# EAGLE board Power_Supply (EAGLE 5.06)
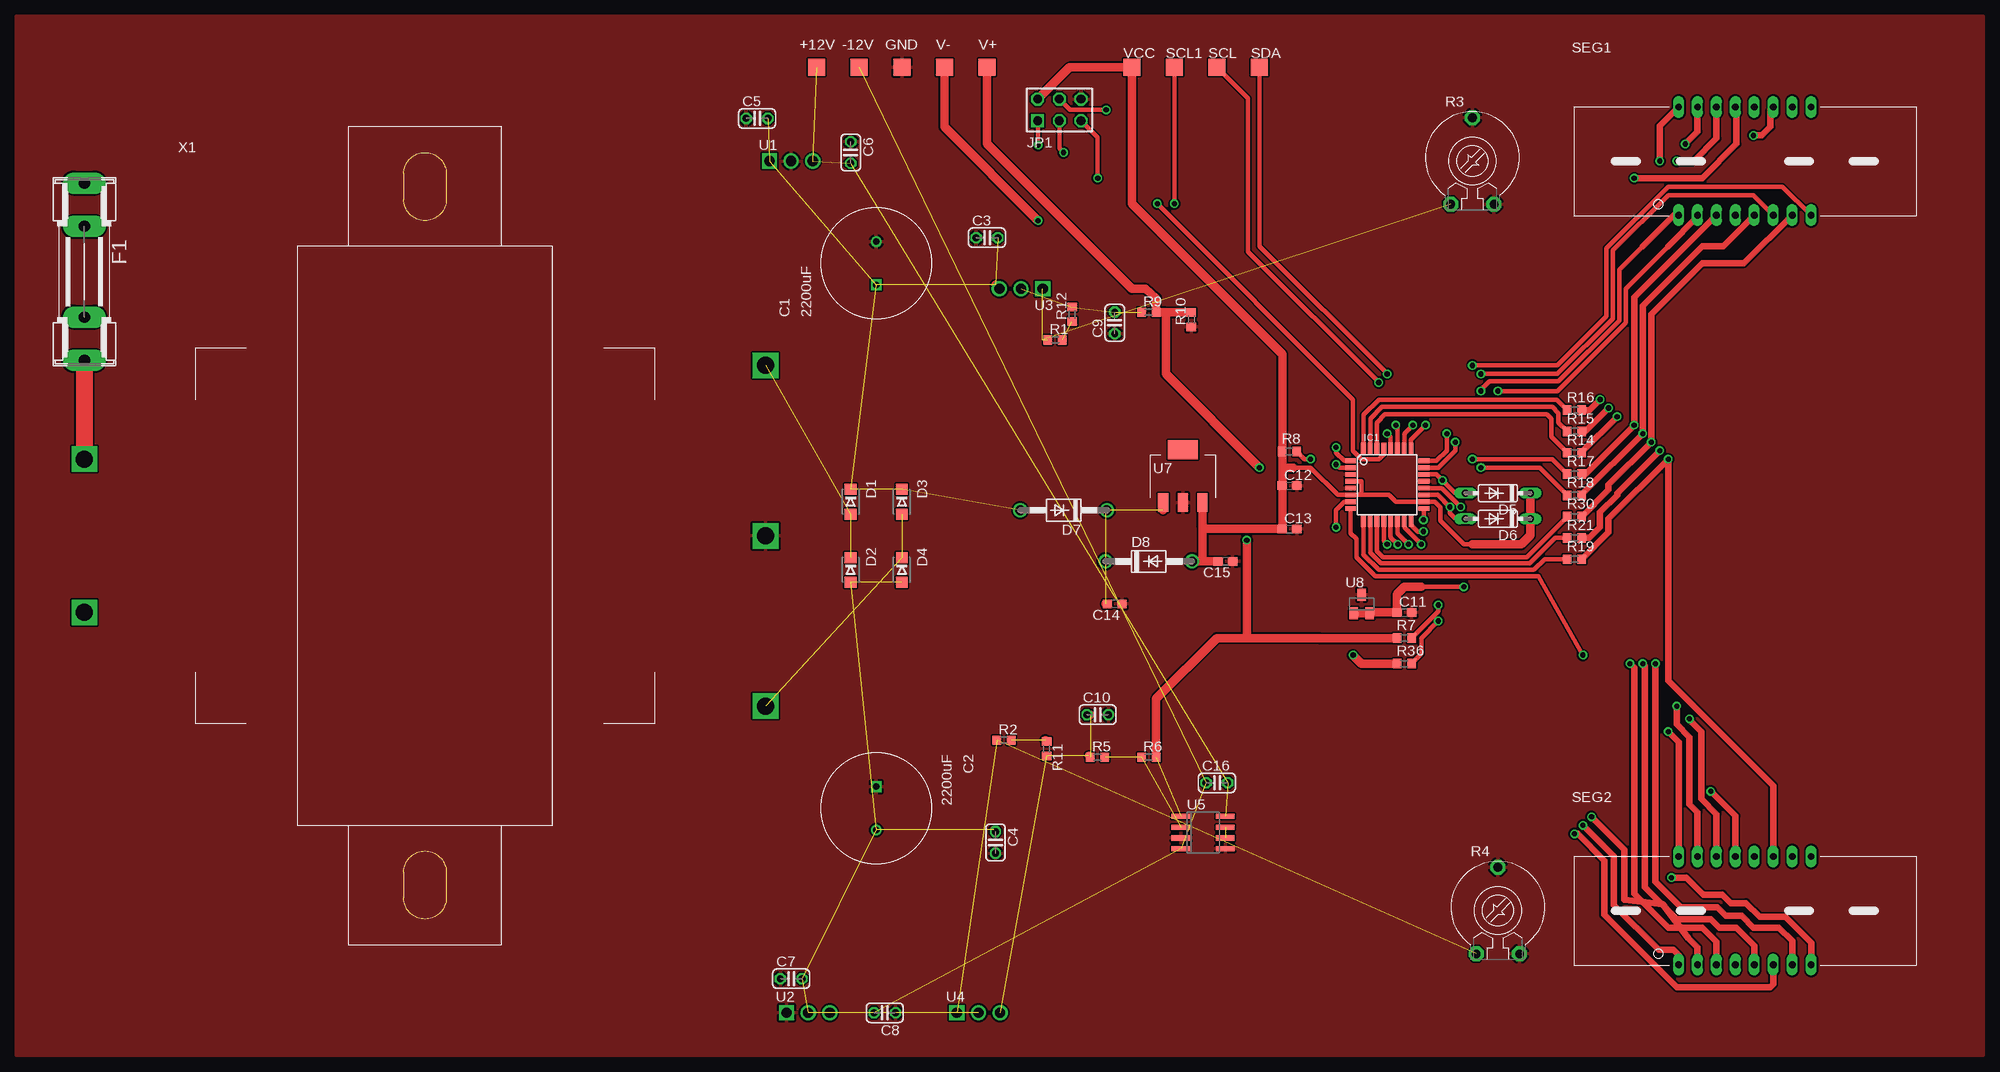
[diagram p0: board, top side]
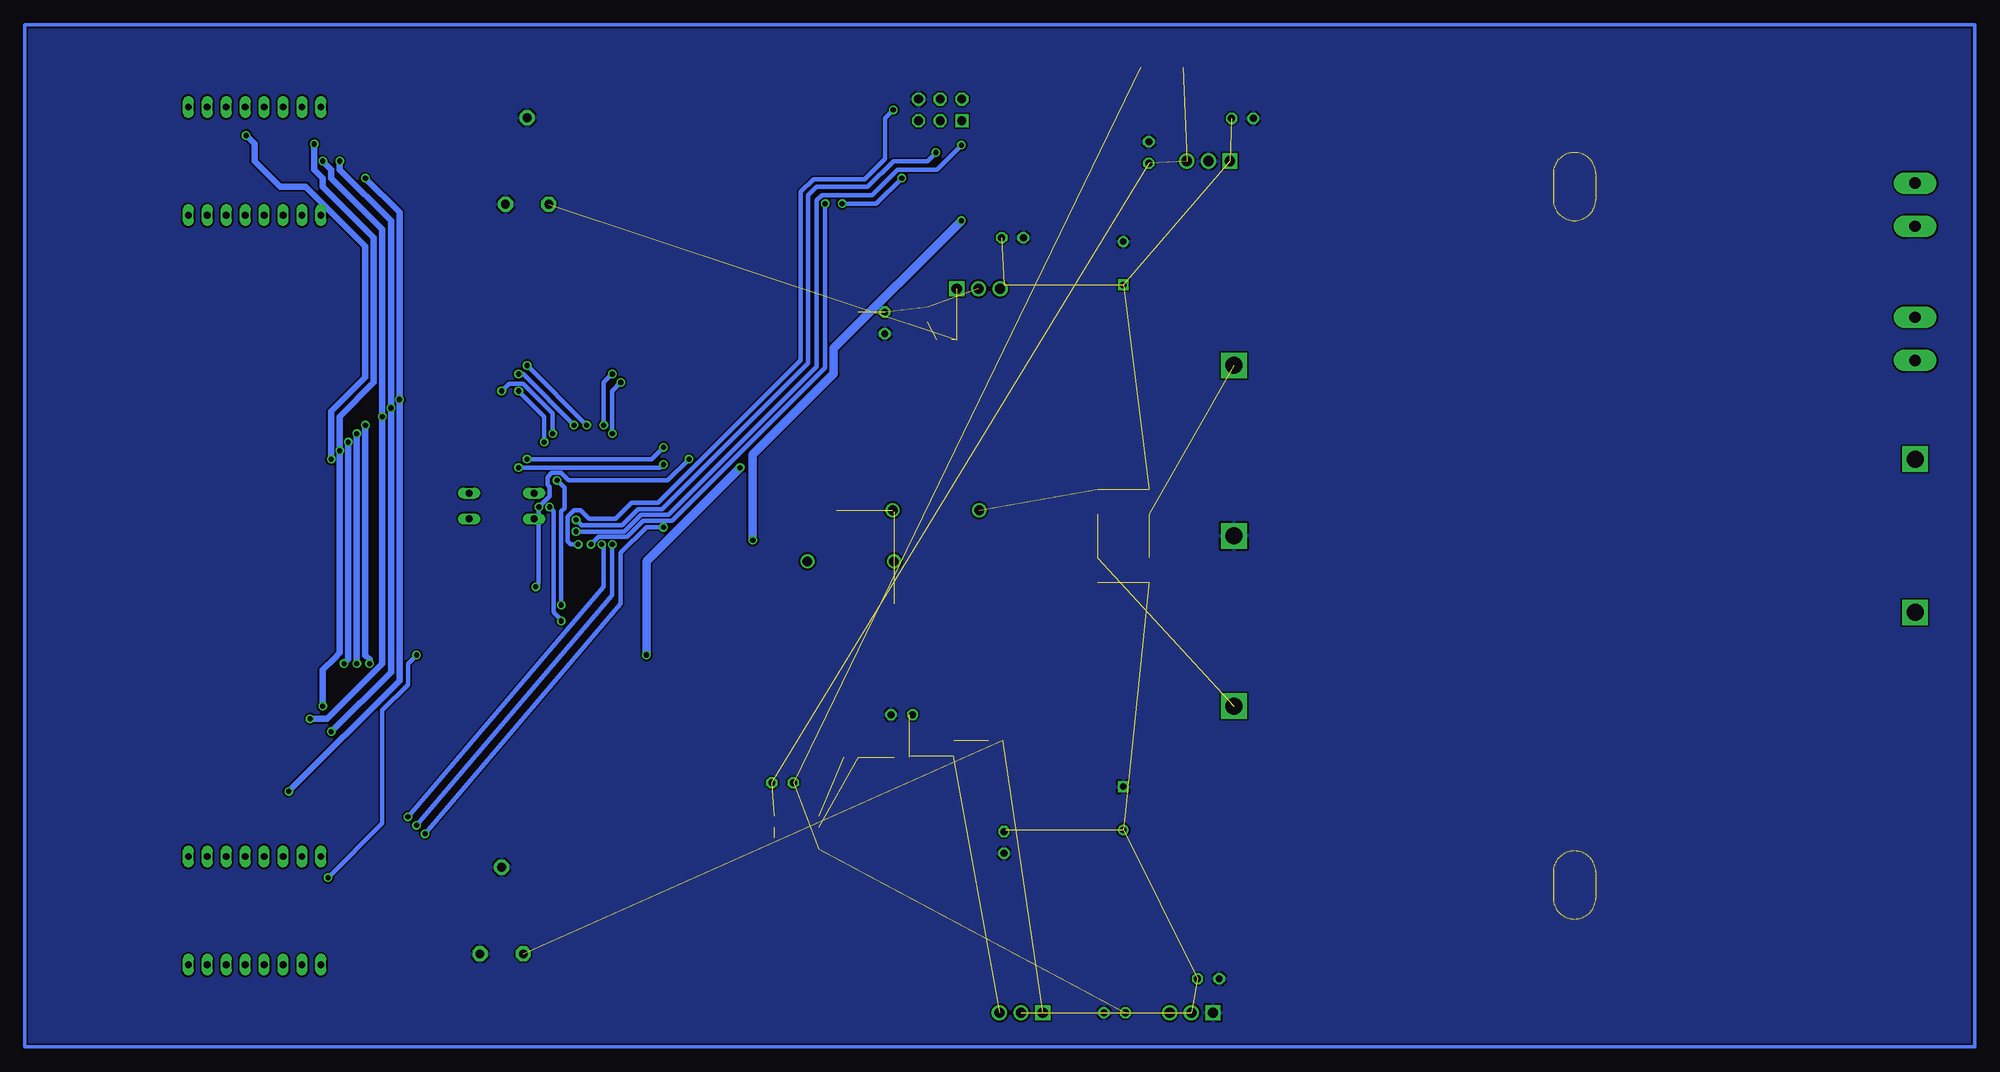
[diagram p1: board, bottom side, seen from below]

No outline drawn. Coordinates in mm, seen from the top.
Copper layers (1*16): Top 0.035mm / dielectric 1.5mm / Bottom 0.035mm
Design rules "default": minimum track width 10mil, minimum drill 24mil, track to track 8mil, track to pad 8mil, pad to pad 8mil, via to via 8mil, smd to smd 8mil, copper to edge 40mil, drill to drill 8mil, minimum pad ring 10mil, minimum via ring 8mil, stop-mask expansion 4mil, vias tented up to drill 0mil, thermal gap 10mil

## Footprints (pad centres in the part's own frame; a part is rotated, then mirrored left to right if it is on the bottom)
TP20SQ = smd 2 x 2: TP 0,0
ESK228M = drill 0.762 square: LL+ -2.54,0 | drill 0.762 round: LL- 2.54,0
C025-024X044 = drill 0.813 octagon: 1 -1.27,0; 2 1.27,0
C0603 = smd 1.1 x 1: 1 -0.85,0; 2 0.85,0
DO-219AB = smd 1.295 x 1.397: A -1.448,0; C 1.448,0
DO35-7 = drill 0.813 long: A 3.81,0; C -3.81,0
DO41-10 = drill 1.118 round: A 5.08,0; C -5.08,0
SHK20L = drill 1.321 pad 2.54 long: 1A -10.414,0; 1B -5.334,0; 2A 10.414,0; 2B 5.334,0
TQFP32-08 = smd 1.27 x 0.559: 1 -4.293,2.8; 2 -4.293,2; 3 -4.293,1.2; 4 -4.293,0.4; 5 -4.293,-0.4; 6 -4.293,-1.2; 7 -4.293,-2; 8 -4.293,-2.8; 17 4.293,-2.8; 18 4.293,-2; 19 4.293,-1.2; 20 4.293,-0.4; 21 4.293,0.4; 22 4.293,1.2; 23 4.293,2; 24 4.293,2.8 | smd 0.559 x 1.27: 9 -2.8,-4.293; 10 -2,-4.293; 11 -1.2,-4.293; 12 -0.4,-4.293; 13 0.4,-4.293; 14 1.2,-4.293; 15 2,-4.293; 16 2.8,-4.293; 25 2.8,4.293; 26 2,4.293; 27 1.2,4.293; 28 0.4,4.293; 29 -0.4,4.293; 30 -1.2,4.293; 31 -2,4.293; 32 -2.8,4.293
AVR-ISP-6 = drill 1.016 square: 1 -2.54,-1.27 | drill 1.016 octagon: 2 -2.54,1.27; 3 0,-1.27; 4 0,1.27; 5 2.54,-1.27; 6 2.54,1.27
R0603 = smd 1 x 1.1: 1 -0.85,0; 2 0.85,0
PT-10 = drill 1.016 pad 1.778 octagon: 1 -2.54,-5.08; 2 2.54,-5.08; 3 0,5.08
TDCX10X0M = drill 0.8 long: 1 -7.779,-6.35; 2 -5.556,-6.35; 3 -3.334,-6.35; 4 -1.111,-6.35; 5 1.111,-6.35; 6 3.334,-6.35; 7 5.556,-6.35; 8 7.779,-6.35; 9 7.779,6.35; 10 5.556,6.35; 11 3.334,6.35; 12 1.111,6.35; 13 -1.111,6.35; 14 -3.334,6.35; 15 -5.556,6.35; 16 -7.779,6.35
T0-220 = drill 1.2 pad 1.7 square: P1 -2.54,0 | drill 1.2 pad 1.7 round: P2 0,0; P3 2.54,0
SO08 = smd 0.6 x 2.2: 1 -1.905,-2.6; 2 -0.635,-2.6; 3 0.635,-2.6; 4 1.905,-2.6; 5 1.905,2.6; 6 0.635,2.6; 7 -0.635,2.6; 8 -1.905,2.6
SOT223 = smd 1.194 x 2.21: 1 -2.311,-3.099; 2 0,-3.099; 3 2.311,-3.099 | smd 3.505 x 2.21: VOUT 0,3.099
SOT23 = smd 1 x 1.4: 1 -0.95,-1.1; 2 0.95,-1.1; 3 0,1.1
TRF-165 = drill 2 square: GND 40,0; VIN1 -40,9; VIN2 -40,-9; VOUT+ 40,20; VOUT- 40,-20

## Placement (x,y rotation side)
+12V  TPTP20SQ  [TP20SQ]  -47,55 0 top
-12V  TPTP20SQ  [TP20SQ]  -42,55 0 top
C1  2200uF  [ESK228M]  -40,32 90 top
C2  2200uF  [ESK228M]  -40,-32 270 top
C3  1u  [C025-024X044]  -27,35 0 top
C4  1u  [C025-024X044]  -26,-36 270 top
C5  2.2u  [C025-024X044]  -54,49 0 top
C6  1u  [C025-024X044]  -43,45 270 top
C7  2.2u  [C025-024X044]  -50,-52 0 top
C8  1u  [C025-024X044]  -39,-56 180 top
C9  1u  [C025-024X044]  -12,25 90 top
C10  1u  [C025-024X044]  -14,-21 0 top
C11  1u  [C0603]  22,-9 0 top
C12  1u  [C0603]  8.52,5.88 0 top
C13  1u  [C0603]  8.52,0.8 0 top
C14  10uF  [C0603]  -12,-8 180 top
C15  10uF  [C0603]  1,-3 180 top
C16  0.1u 50V  [C025-024X044]  0,-29 0 top
D1  VS-2EFH02HM3/I  [DO-219AB]  -43,4 90 top
D2  VS-2EFH02HM3/I  [DO-219AB]  -43,-4 90 top
D3  VS-2EFH02HM3/I  [DO-219AB]  -37,4 90 top
D4  VS-2EFH02HM3/I  [DO-219AB]  -37,-4 90 top
D5  [DO35-7]  33,5 180 top
D6  [DO35-7]  33,2 180 top
D7  [DO41-10]  -18,3 180 top
D8  [DO41-10]  -8,-3 0 top
F1  F1  [SHK20L]  -133,31 270 top
GND  TPTP20SQ  [TP20SQ]  -37,55 0 top
IC1  ATMEGA8L-8AU  [TQFP32-08]  20,6 0 top
JP1  AVR-ISP-6  [AVR-ISP-6]  -18.5,50 0 top
R1  180  [R0603]  -19,23 0 top
R2  180  [R0603]  -25,-24 0 top
R3  2k  [PT-10]  30,44 0 top
R4  2k  [PT-10]  33,-44 0 top
R5  120k  [R0603]  -14,-26 0 top
R6  20k  [R0603]  -8,-26 0 top
R7  1k  [R0603]  22,-12 0 top
R8  1k  [R0603]  8.52,9.9 0 top
R9  100k  [R0603]  -8,26.25 0 top
R10  20k  [R0603]  -3,25.38 90 top
R11  0  [R0603]  -20,-25 270 top
R12  0  [R0603]  -17,26 90 top
R14  1k  [R0603]  42,9.75 0 top
R15  1k  [R0603]  42,12.25 0 top
R16  1k  [R0603]  42,14.75 0 top
R17  1k  [R0603]  42,7.25 0 top
R18  1k  [R0603]  42,4.75 0 top
R19  1k  [R0603]  42,-2.75 0 top
R21  1k  [R0603]  42,-0.25 0 top
R30  1k  [R0603]  42,2.25 0 top
R36  1k  [R0603]  22,-15 0 top
SCL  TPTP20SQ  [TP20SQ]  0,55 0 top
SCL1  TPTP20SQ  [TP20SQ]  -5,55 0 top
SDA  TPTP20SQ  [TP20SQ]  5,55 0 top
SEG1  TDCG1050M-ND  [TDCX10X0M]  62,44 0 top
SEG2  TDCR1050M-ND  [TDCX10X0M]  62,-44 0 top
U1  L7812AVC-GD  [T0-220]  -50,44 0 top
U2  L7912ACV-DG  [T0-220]  -48,-56 0 top
U3  LM317TG  [T0-220]  -23,29 180 top
U4  LM237KCE3  [T0-220]  -28,-56 0 top
U5  LM358D  [SO08]  -1.62,-34.84 270 top
U7  AZ1117IH-5.0TRG1  [SOT223]  -4,7 0 top
U8  AS431  [SOT23]  17,-8 0 top
V+  TPTP20SQ  [TP20SQ]  -27,55 0 top
V-  TPTP20SQ  [TP20SQ]  -32,55 0 top
VCC  TPTP20SQ  [TP20SQ]  -10,55 0 top
X1  TRF-165  [TRF-165]  -93,0 0 top

## Library data of the parts
+12V -12V GND SCL SCL1 SDA V+ V- VCC = testpad
C1 C2 D1-D4 SEG1 SEG2 U1-U4 U7 U8 X1 = VladimirG
C3-C16 R1-R6 R9-R12 = rcl
D5-D8 = diode
F1 = fuse
IC1 = atmega8
JP1 = avr-4
R7 R8 R14-R19 R21 R30 R36 = resistor
U5 = linear

## Nets
+12V: +12V.TP C6.2 C16.2 U1.P3 U5.8
-12V: -12V.TP C8.2 C16.1 U2.P3 U5.4
ADC+: D6.A IC1.19 R36.2
ADC-: D5.A IC1.22 R7.2
AN1: IC1.23 SEG1.1
AN2: IC1.24 SEG1.2
AN3: IC1.25 SEG1.6
AN4: IC1.26 SEG1.8
AN5: IC1.12 SEG2.1
AN6: IC1.13 SEG2.2
AN7: IC1.7 SEG2.6
AN8: IC1.8 SEG2.8
AREF: C11.1 IC1.20 R8.2 U8.1 U8.2
DP_SEG: R30.2 SEG1.7 SEG2.7
GND: C1.LL- C2.LL+ C3.1 C4.2 C5.1 C6.1 C7.1 C8.1 C9.1 C10.2 C11.2 C12.2 C13.2 C14.1 C15.1 GND.TP IC1.3 IC1.5 IC1.21 JP1.6 R3.2 R3.3 R4.2 R4.3 R10.1 U1.P2 U2.P1 U5.3 U5.5 U7.2 U8.3 X1.GND
MISO: IC1.16 JP1.1
MOSI: IC1.15 JP1.4
N$1: IC1.30 R14.1
N$4: IC1.31 R15.1
N$5: U5.6 U5.7
N$6: IC1.32 R16.1
N$7: IC1.1 R17.1
N$8: C10.1 R5.1 R11.2 U4.P3
N$9: R1.1 R3.1 U3.P1
N$10: R2.1 R4.1 U4.P1
N$11: IC1.2 R18.1
N$12: IC1.9 R19.1
N$13: IC1.10 R21.1
N$14: IC1.11 R30.1
N$15: R2.2 R11.1
N$16: R5.2 R6.1 U5.2
N$17: R1.2 R12.1
N$19: C14.2 D7.C D8.C U7.1
N$20: F1.2A X1.VIN1
RESET: IC1.29 JP1.5
SCK: IC1.17 JP1.3
SCL: IC1.28 SCL.TP
SDA: IC1.27 SDA.TP
SEG_A: R14.2 SEG1.14 SEG2.14
SEG_B: R15.2 SEG1.16 SEG2.16
SEG_C: R16.2 SEG1.13 SEG2.13
SEG_D: R17.2 SEG1.3 SEG2.3
SEG_E: R18.2 SEG1.5 SEG2.5
SEG_F: R19.2 SEG1.11 SEG2.11
SEG_G: R21.2 SEG1.15 SEG2.15
SS: IC1.14 SCL1.TP
V+: R9.2 R10.2 R36.1 V+.TP
V-: R6.2 R7.1 U5.1 V-.TP
V_POS_REG: C9.2 R9.1 R12.2 U3.P2
V_UNREG+: C1.LL+ C3.2 C5.2 D1.C D3.C D7.A U1.P1 U3.P3
V_UNREG-: C2.LL- C4.1 C7.2 D2.A D4.A U2.P2 U4.P2
VCC: C12.1 C13.1 C15.2 D5.C D6.C D8.A IC1.4 IC1.6 IC1.18 JP1.2 R8.1 U7.3 VCC.TP
VIN+: F1.1A
VIN-: X1.VIN2
VOUT+: D1.A D2.C X1.VOUT+
VOUT-: D3.A D4.C X1.VOUT-

## Tracks (layer width: path | path; a pad name or v marks a point on that pad's centre or on a via)
+12V  (4 unrouted)
-12V  (4 unrouted)
ADC+  (via drill 0.6)
  Top 0.5: R36.2 24,-13.85 24,-12 v26,-10 | IC1.19 25.95,4.8 v27.38,3.38 27.38,2.62 28,2 D6.A
  Bottom 0.5: v26,-10 26,-9.88 26.88,-9 26.88,2.88 v27.38,3.38
ADC-  (via drill 0.6)
  Top 0.5: IC1.22 25.8,7.2 v26.5,6.5 28,5 D5.A | R7.2 26,-8.85 v26,-8.12
  Bottom 0.5: v26,-8.12 26,2.88 25.62,3.25 25.62,5.62 v26.5,6.5
AN1  (via drill 0.6)
  Top 0.5: IC1.23 26,8 28,10 v28,11 | 50,34 47.25,31.25 47.25,25.25 40.12,18.12 32,18.12 31,17.12 v31,17
  Top 0.75: 50,34 53.65,37.65 SEG1.1
  Bottom 0.5: v31,17 28,14 v28,11
AN2  (via drill 0.6)
  Top 0.5: IC1.24 25.8,8.8 27,10 v27,12 | 53,34 48,29 48,25 40,17 v33,17
  Top 0.75: 53,34 56.44,37.44 SEG1.2
  Bottom 0.5: 27,13 27,14.25 | v33,17 32.12,17.88 30.5,17.88 27,14.38 27,13 | v27,12 27,13
AN3  (via drill 0.6)
  Top 0.5: IC1.25 22.8,11.3 v24.5,13 | SEG1.6 62.98,40 53,40 46.5,33.5 46.5,25.5 40,19 v31,19
  Bottom 0.5: v24.5,13 30.5,19 v31,19
AN4  (via drill 0.6)
  Top 0.5: IC1.26 22,12 v23,13 | SEG1.8 66.43,41 53,41 45.75,33.75 45.75,25.75 40,20 v30,20
  Bottom 0.5: v23,13 v30,20
AN5  (via drill 0.6)
  Top 0.5: IC1.12 19.6,-0.6 v20,-1
  Top 0.75: v43,-34 46.62,-37.62 46.62,-43.38 51.88,-48.62 53.62,-48.62 54.22,-49.22 SEG2.1
  Bottom 0.5: v20,-1 20,-7 v43,-34
AN6  (via drill 0.6)
  Top 0.5: IC1.13 20.4,-0.15 v21.25,-1
  Top 0.75: v44,-33 47.88,-36.88 47.88,-42.75 52.38,-43.25 55.38,-47.25 56.44,-48.32 SEG2.2
  Bottom 0.5: v44,-33 21,-6 21,-1.25 v21.25,-1
AN7  (via drill 0.6)
  Top 0.5: v14,1 14,3 15,4 IC1.7
  Top 0.75: SEG2.6 65.33,-52.67 65,-53 54,-53 45.5,-44.5 45.5,-38.12 42.38,-35 v42,-35
  Bottom 0.5: v42,-35 19,-8 19,-2 16,1 v14,1
AN8  (via drill 0.6)
  Top 0.5: v43,-14 37.75,-4.75 18.62,-4.75 16.38,-2.5 16.38,-0.38 15.71,0.29 IC1.8
  Top 0.75: SEG2.8 69.78,-47.78 66.75,-44.75 63.75,-44.75 62.12,-43.12 60.38,-43.12 59.38,-42.12 57.12,-42.12 55.12,-40.12 v53.38,-40.12
  Bottom 0.5: v53.38,-40.12 47,-33.75 47,-20.5 44,-17.5 44,-15 v43,-14
AREF  (via drill 0.6)
  Top 0.5: IC1.20 26.4,5.6 v28.62,3.38 | v11,9 10.27,9 R8.2 | 24,-6 v29,-6
  Top 1: U8.1 U8.2 18.05,-9 C11.1 21.15,-6.85 22,-6 24,-6
  Bottom 0.5: v11,9 13.5,6.5 25.12,6.5 26,7.38 27.12,7.38 27.62,6.88 27.62,6 27.38,5.75 27.38,4.62 v28.62,3.38 28.62,-5.62 v29,-6
DP_SEG  (via drill 0.6)
  Top 0.75: R30.2 46,5.4 46,6 v51,11 51,26 57,32 61.91,32 SEG1.7 | SEG2.7 67.56,-47.56 66,-46 63,-46 61.62,-44.62 59.75,-44.62 58.75,-43.62 54.5,-43.62 51.5,-40.62 v51.5,-15
  Bottom 0.75: v51,11 51,-14.5 v51.5,-15
GND
  pour Top: -141,-61 -141,61 90,61 90,-61
  pour Bottom: -142,-62 -142,62 91,62 91,-62
MISO  (via drill 0.6)
  Top 0.5: IC1.16 22.8,1.32 23.62,0.5 v24.25,0.5 | v-21,45.88 -21,48.69 JP1.1
  Bottom 0.5: -4,25 -4,24.5 | -4,23.5 -4,25 | -4,23.5 -4,23.12 | -4,25 -4,39.38 -4.62,40 -10.5,40 -13.5,43 -18.12,43 v-21,45.88 | v24.25,0.5 18.62,0.5 16.62,2.5 13.38,2.5 -4,19.88 -4,23.5
MOSI  (via drill 0.6)
  Top 0.5: 22,2 IC1.15 22,1 v24,-1 | v-13,50 -17.23,50 JP1.4
  Bottom 0.5: v24,-1 24.88,-1 25.25,-0.62 25.25,2.25 24.5,3 23.75,3 22.75,2 19.62,2 17.75,3.88 14.62,3.88 -2.12,20.62 -2.12,40.38 -3.62,41.88 -9.62,41.88 -12,44.25 -12,49 v-13,50
N$1
  Top 0.5: 41.25,9.75 R14.1 39.25,11.65 39.25,13.75 38.75,14.25 19.75,14.25 18.8,13.3 IC1.30
N$4
  Top 0.5: IC1.31 18,13.75 19.38,15.12 39.38,15.12 40.12,14.38 40.12,13.28 R15.1
N$5  (1 unrouted)
N$6
  Top 0.5: 21,16 20,16 | 21,16 39.9,16 R16.1 | IC1.32 17.2,14.2 19,16 21,16
N$7  (via drill 0.6)
  Top 0.5: 40.9,7 R17.1 39.4,9 v30,9 | IC1.1 14.95,8.8 14,9.75 v14,10.38
  Bottom 0.5: v14,10.38 15.38,9 v30,9
N$8  (3 unrouted)
  Top 1: R5.1 -15,-25.85 | -14.85,-21 C10.1
N$9  (3 unrouted)
N$10  (2 unrouted)
N$11  (via drill 0.6)
  Top 0.5: v31,8 37.9,8 R18.1 | IC1.2 14.38,8 v14,8.38
  Bottom 0.5: IC1.2 16,8 | IC1.2 v31,8 | v14,8.38 14.38,8 IC1.2
N$12
  Top 0.5: IC1.9 17.2,-2.2 19,-4 37.25,-4 38.5,-2.75 R19.1
N$13
  Top 0.5: IC1.10 18,-2 19.25,-3.25 36.75,-3.25 39.75,-0.25 R21.1
N$14
  Top 0.5: IC1.11 18.8,-1.8 19.5,-2.5 36.4,-2.5 R30.1
N$15  (1 unrouted)
  Top 1: R11.1 -20.15,-24
N$16  (2 unrouted)
N$17  (1 unrouted)
N$19  (3 unrouted)
  Top 1: U7.1 -6.31,3 | D7.C -13.08,2.84 | -13.08,-8 C14.2
N$20
  Top 2: F1.2A X1.VIN1
N$27
  Bottom 0.406: 89,60 -140,60 -140,-60 89,-60 89,60
RESET  (via drill 0.6)
  Top 0.5: IC1.29 19.6,9.6 19,9 17,9 16,10 16,16 v-7,39 | v-14,42 -14,46.77 JP1.5
  Bottom 0.5: v-7,39 -11,39 v-14,42
SCK  (via drill 0.6)
  Top 0.5: IC1.17 24.29,2.33 v24.25,1.88 | v-18,45 -18.5,45.5 JP1.3
  Bottom 0.5: v-18,45 -17,44 -13,44 -10,41 -4,41 -3,40 -3,20.25 14.12,3.12 17,3.12 18.88,1.25 23.62,1.25 v24.25,1.88
SCL  (via drill 0.6)
  Top 0.5: IC1.28 20.4,11.6 v20,12 | v19,18 3.62,33.38 3.62,51.38 SCL.TP
  Bottom 0.5: v20,12 20,17 v19,18
SDA  (via drill 0.6)
  Top 0.5: IC1.27 21.2,12.8 v21,13 | v20,19 5,34 SDA.TP
  Bottom 0.5: v21,13 21,18 v20,19
SEG_A  (via drill 0.6)
  Top 0.75: R14.2 42.85,9.85 v47,14 | v54,44 56,44 58.67,46.67 SEG1.14 | SEG2.14 58.67,-32.67 56.88,-30.88 56.88,-23 55.5,-21.62 v55.5,-21.5
  Bottom 0.75: v54,44 53,43 53,42 47,36 v47,14 47,-15 53.5,-21.5 v55.5,-21.5
SEG_B  (via drill 0.6)
  Top 0.75: R15.2 43.25,12.25 v46,15 | v52,44 52,48.13 SEG1.16 | SEG2.16 54.22,-24.22 v53,-23
  Bottom 0.75: v52,44 52,43 46,37 v46,15 46,-16 v53,-23
SEG_C  (via drill 0.6)
  Top 0.75: R16.2 43.75,14.75 v45,16 | v49,42 57,42 61,46 61,50.24 SEG1.13 | SEG2.13 60.89,-32.89 v58,-30
  Bottom 0.75: v49,42 45,38 v45,16 45,-17 v58,-30
SEG_D  (via drill 0.6)
  Top 0.75: R17.2 43.25,7.25 v49,13 49,27.98 SEG1.3 | SEG2.3 58.67,-47.67 57,-46 53,-46 49,-42 49,-15.5 v48.5,-15
  Bottom 0.75: v48.5,-15 48.5,-14.5 49,-14 v49,13
SEG_E  (via drill 0.6)
  Top 0.75: R18.2 42.85,4.85 v50,12 50,27 57,34 59.46,34 SEG1.5 | SEG2.5 63.11,-48.11 61,-46 59,-46 58,-45 54,-45 50.25,-41.25 50.25,-15.25 v50,-15
  Bottom 0.75: v50,-15 v50,12
SEG_F  (via drill 0.6)
  Top 0.75: R19.2 46,0.4 46,2 v53,9 53,-17 65.33,-29.33 SEG2.11 | v63,47 64,47 65,48 65,50 65.33,50.33 SEG1.11
  Bottom 0.75: v53,9 53,14.62 49,18.62 49,34 56,41 59,41 62,44 62,46 v63,47
SEG_G  (via drill 0.6)
  Top 0.75: R21.2 43.75,-0.25 45,1 45,2.75 47,4.75 47,5 v52,10 | v55,46 56.44,47.44 SEG1.15 | SEG2.15 56.44,-32.44 55.5,-31.5 55.5,-23.62 54,-22.12 v54,-20
  Bottom 0.75: v55,46 55,43 54,42 54,41 48,35 48,18 52,14 v52,10 52,-13.75 52.62,-14.38 | v54,-20 54,-15.75 52.62,-14.38 | 52.62,-14.38 52.12,-13.88
SS  (via drill 0.6)
  Top 0.5: v-5,39 SCL1.TP | IC1.14 21.2,0.3 v22.5,-1
  Bottom 0.5: -5,24 -5,23 | -5,24 v-5,39 | v22.5,-1 21.62,-0.12 18.25,-0.12 16.38,1.75 13,1.75 -5,19.75 -5,24
V+  (via drill 0.6)
  Top 1: -6,26.23 -7.15,26.23 R9.2 -7.15,27.9 -8.38,29 -10,29 -27,46 V+.TP | -6,26.23 R10.2 | R36.1 17,-15 v16,-14 | v5,8 -6,19 -6,26.23
  Bottom 1: v16,-14 16,-3 v5,8
V-  (via drill 0.6)  (1 unrouted)
  Top 1: 12,-12 11,-12 | 12,-12 R7.1 | R6.2 -7.15,-19.15 0,-12 3.5,-12 | 12,-12 3.5,-12 | V-.TP -32,48 v-21,37 | 3.5,-12 v3.5,-0.5
  Bottom 1: v-21,37 -6,22 -6,19 3.5,9.5 v3.5,-0.5
V_POS_REG  (3 unrouted)
V_UNREG+  (7 unrouted)
  Top 1: U3.P3 -26,29.46
V_UNREG-  (6 unrouted)
  Top 1: C4.1 -26.19,-34.54
VCC
  Top 0.5: 17,4.8 IC1.6 14.2,4.8 11,8 9,8 | 17,4.8 20.2,4.8 21,4 IC1.18 25.62,4 26.25,3.38 26.25,1.75 29,-1 30,-1 | IC1.4 17,6.4 17,4.8
  Top 1: -2,-3 D8.A | -2,-3 C15.2 | -1.69,1 -1.69,-3 -2,-3 | -1.69,1 U7.3 | D5.C D6.C 36.81,0.06 35.75,-1 30,-1 | JP1.2 -17.31,55 VCC.TP -10,39 7.67,21.33 7.67,9 | C12.1 C13.1 -1.49,0.8 -1.69,1 | C12.1 7.67,8 | 7.67,8 7.67,9 | 7.67,9 R8.1 | 7.67,8 8,8 | 8,8 9,8 | C12.1 7.67,7.67 8,8
VOUT+  (2 unrouted)
VOUT-  (2 unrouted)